# Altium PCB CANLINK_revA.PcbDoc (part 1 of 2)
Units mm, origin at the board's own origin, x right, y up, seen from the top; angles counter-clockwise.
Board outline 58.5 x 50 mm, 4 copper layers (Top Layer, Mid Layer 1, Mid Layer 2, Bottom Layer), stack 1.586 mm thick; 130 components, 134 nets, 434 pads, 142 vias.
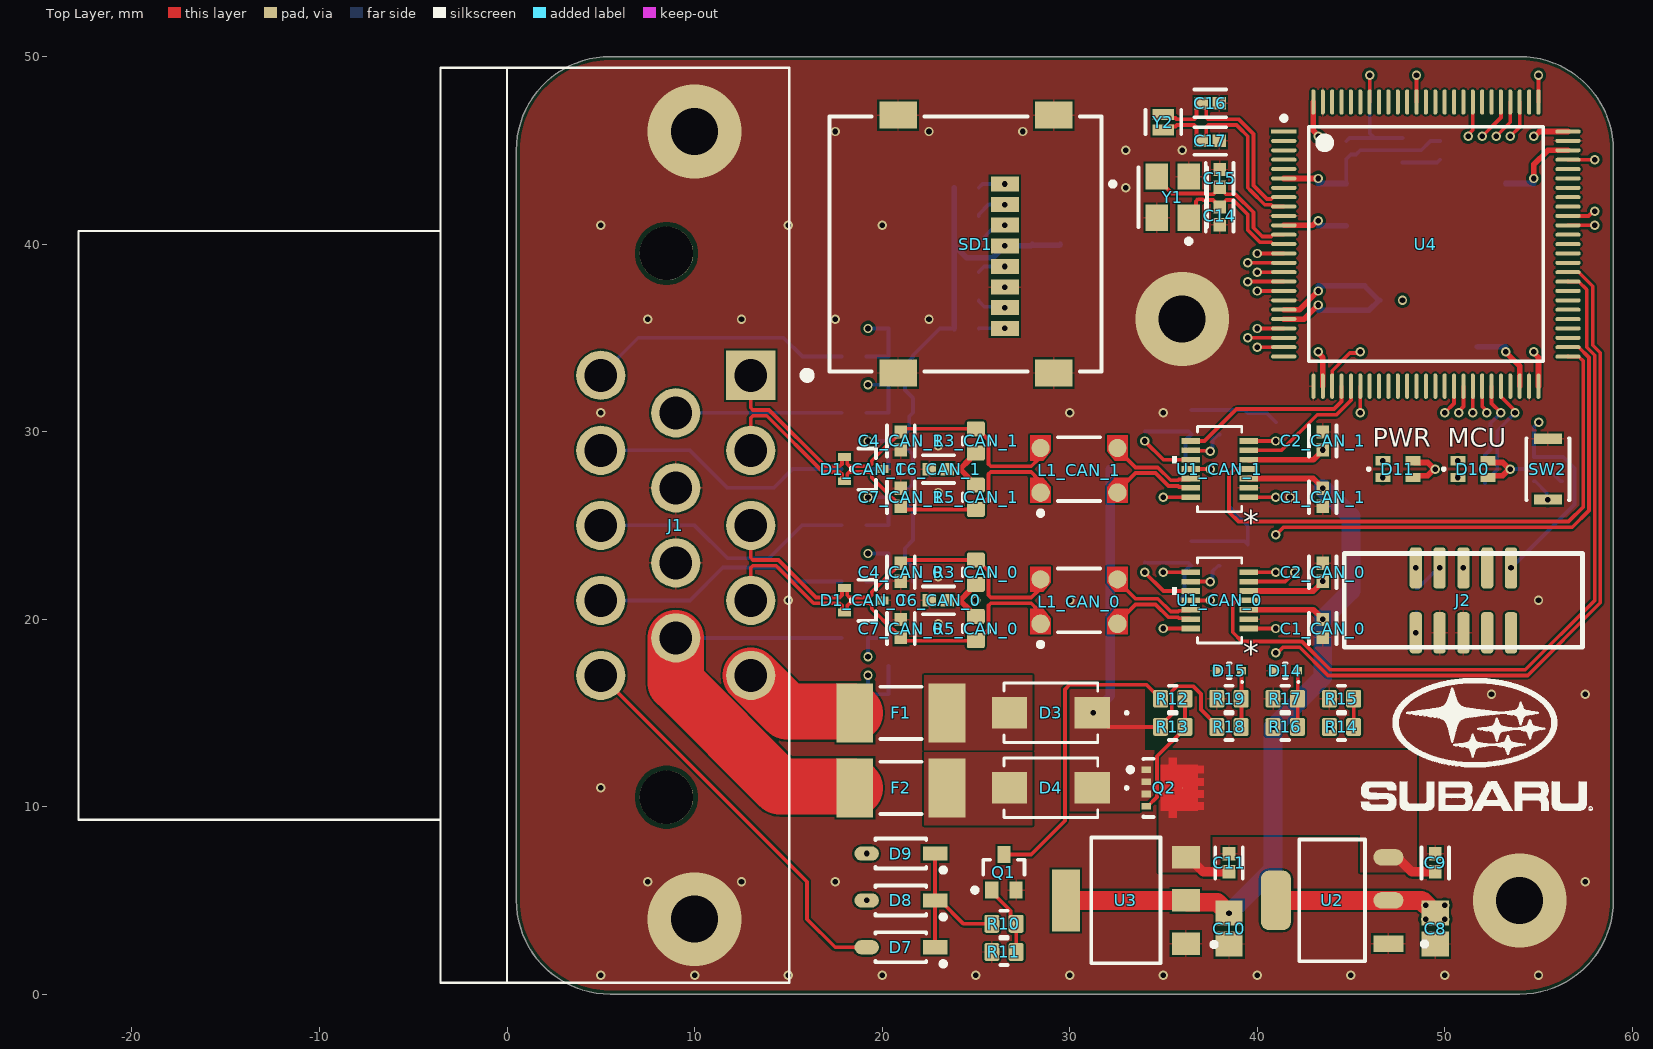
[diagram p0: Top Layer view]
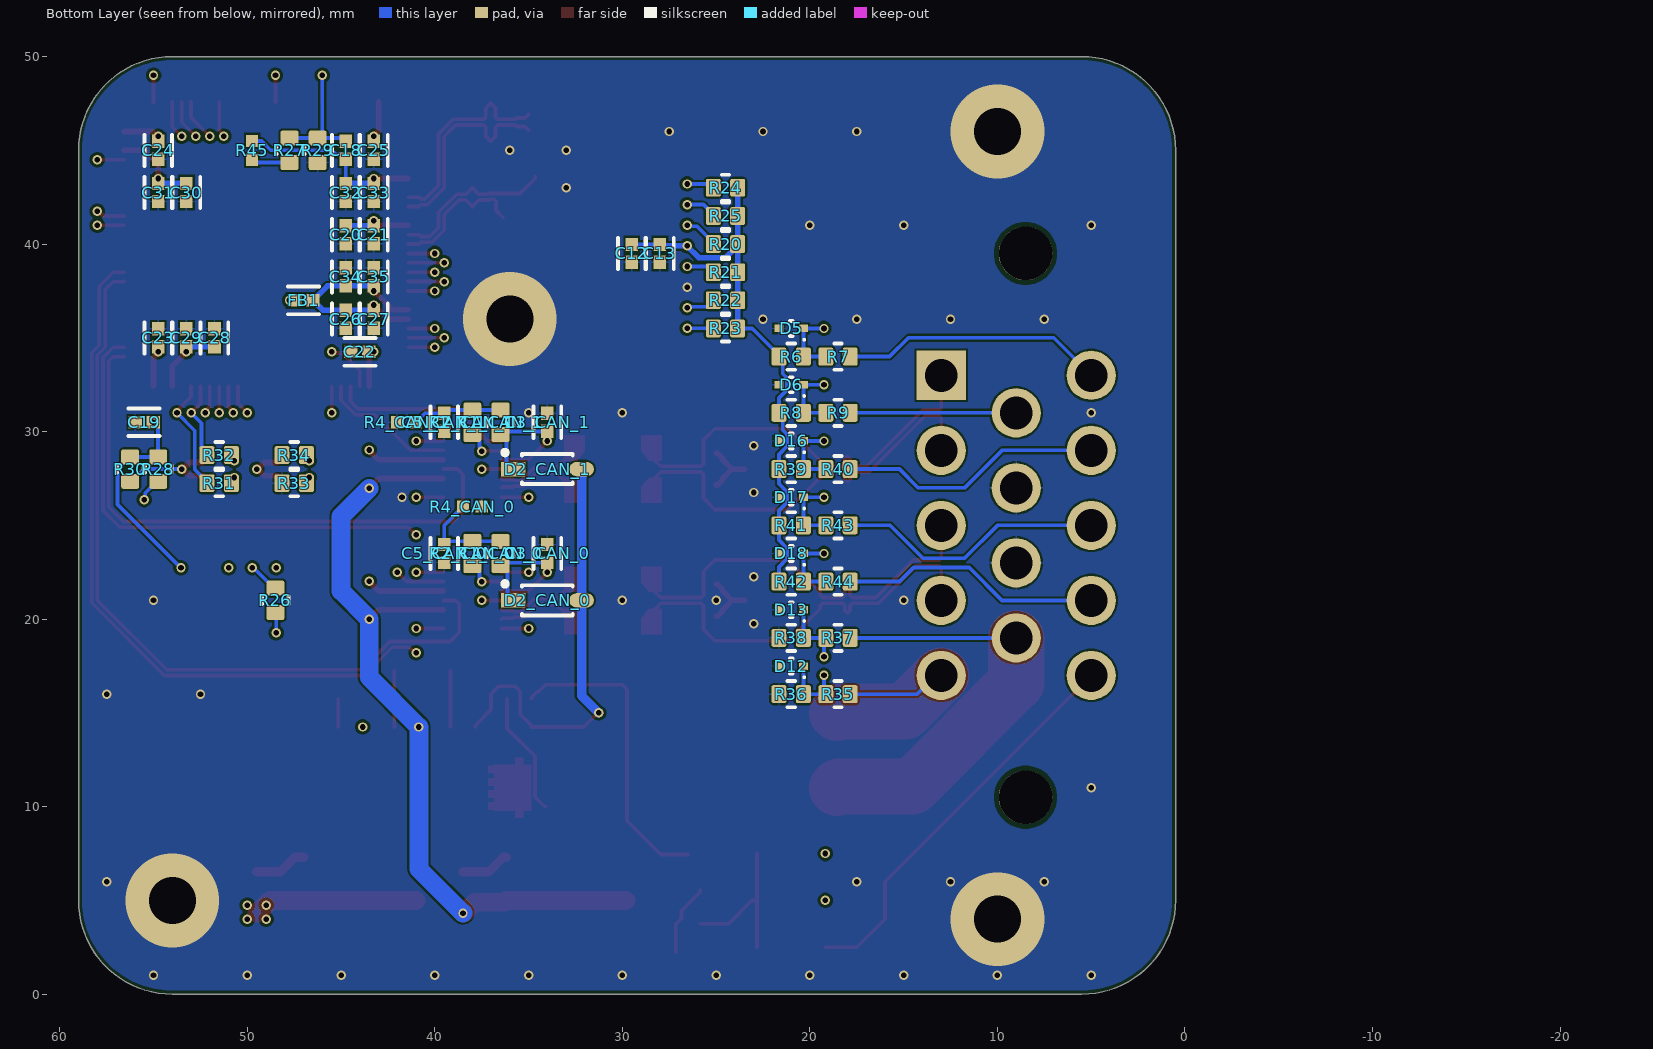
[diagram p1: Bottom Layer view, seen from below]
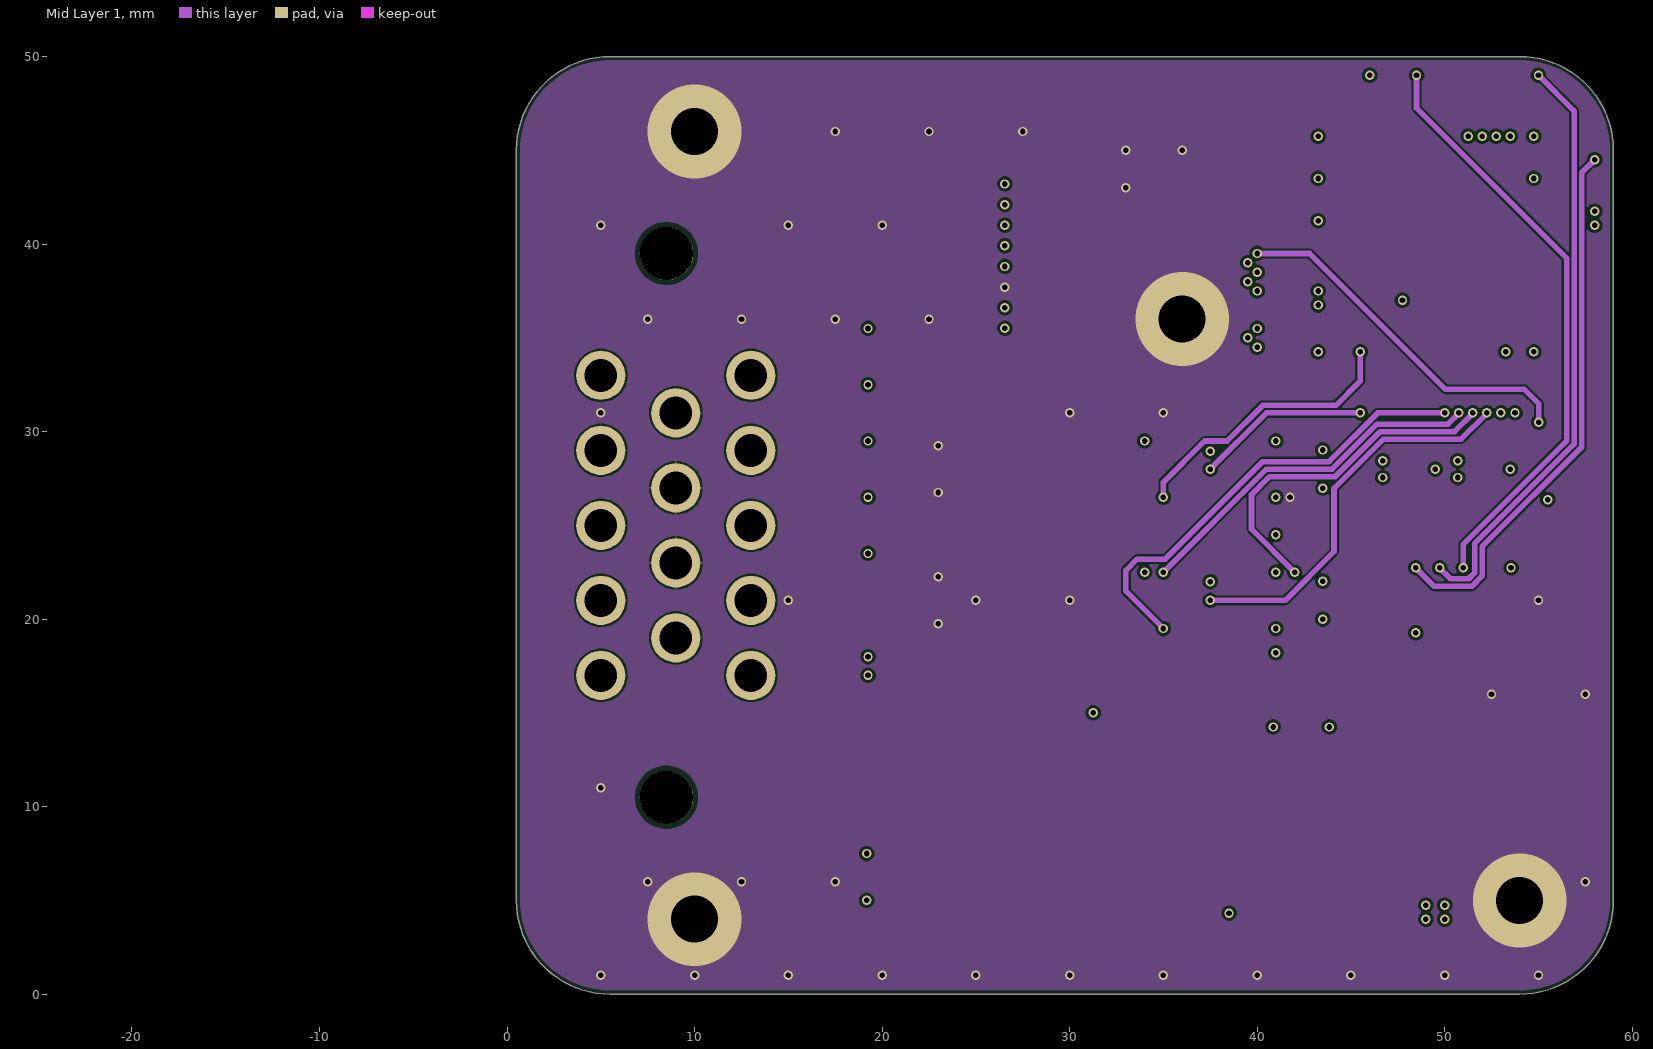
[diagram p2: Mid Layer 1]
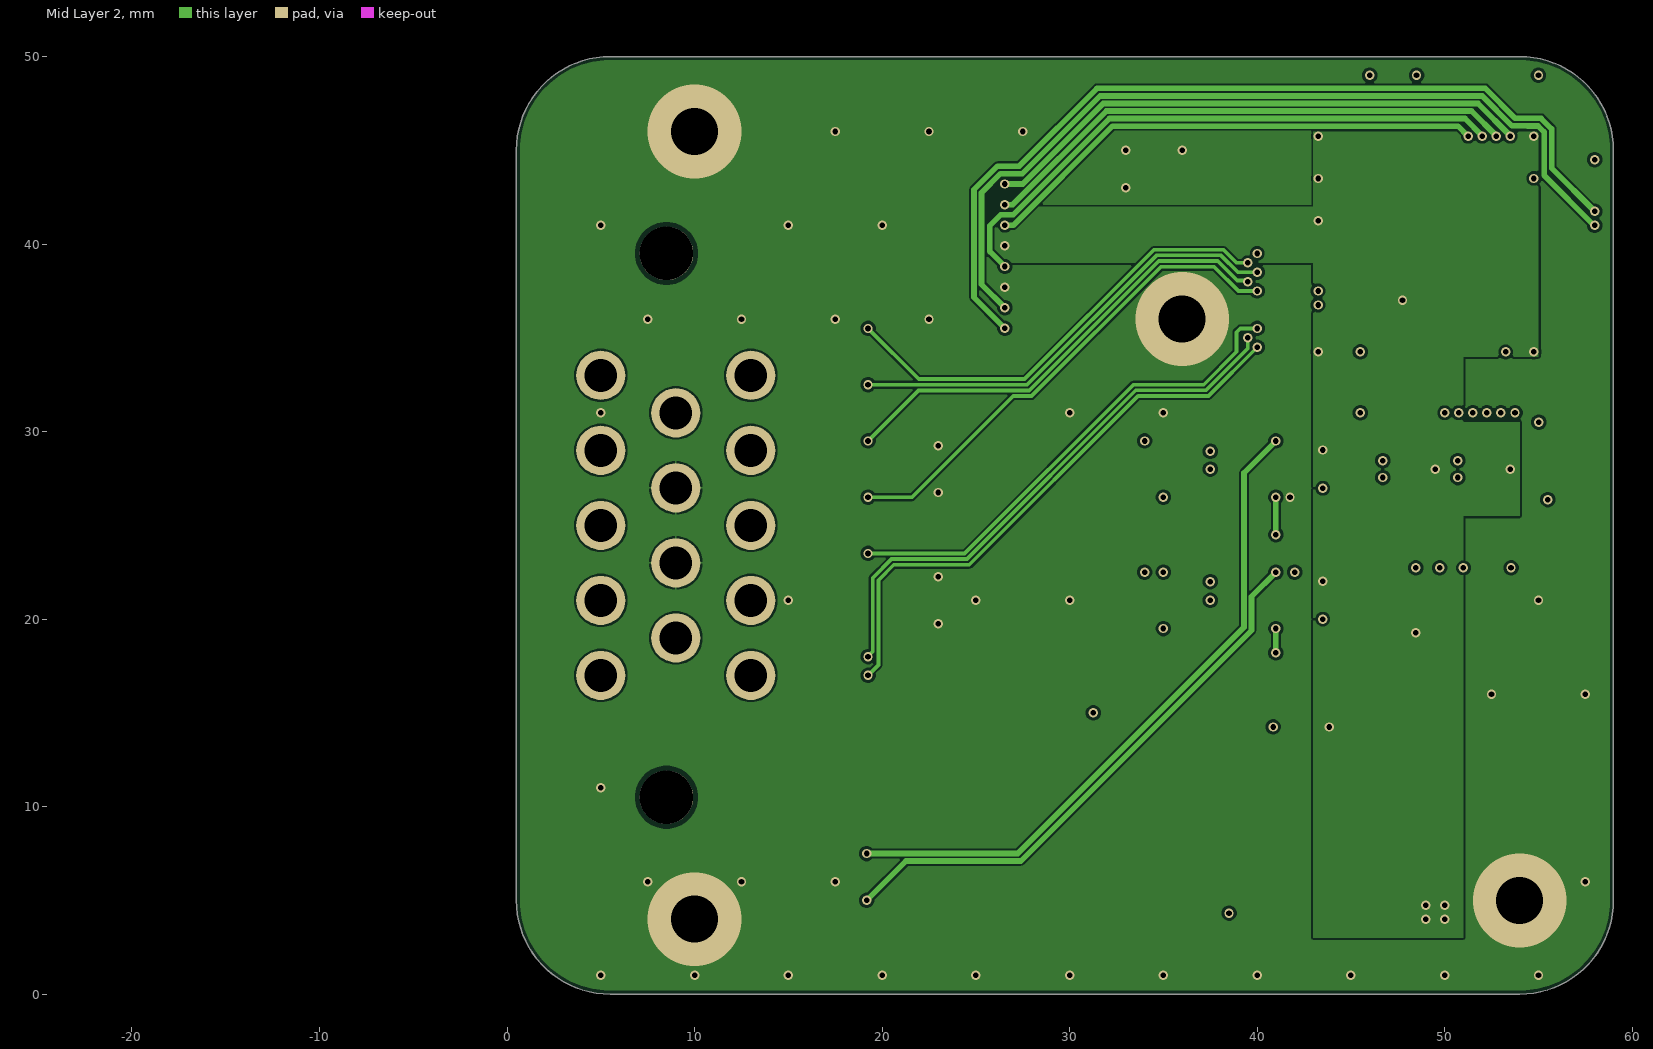
[diagram p3: Mid Layer 2]
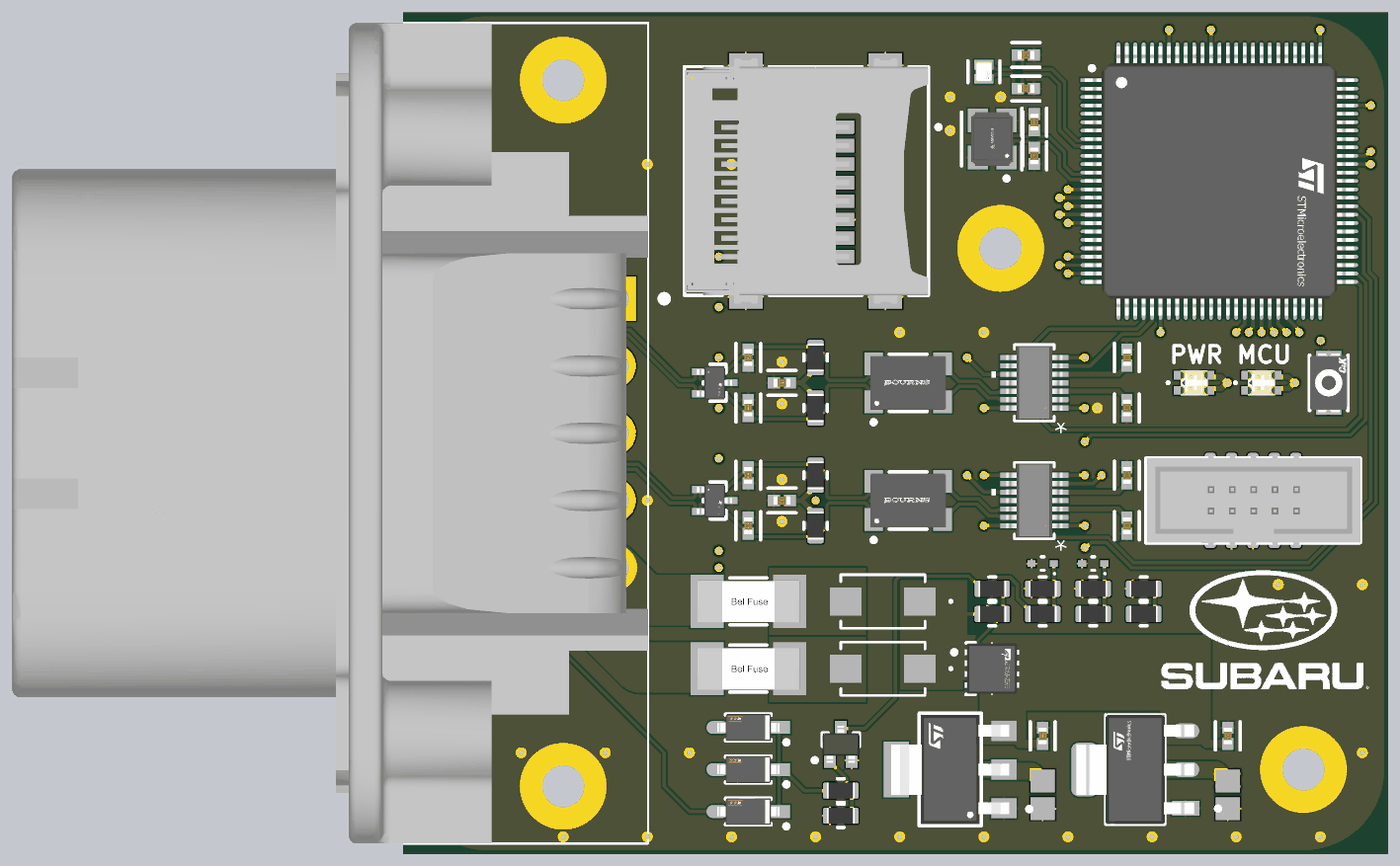
[diagram p5: 3D render of the assembled board from above, using the file's embedded part models]
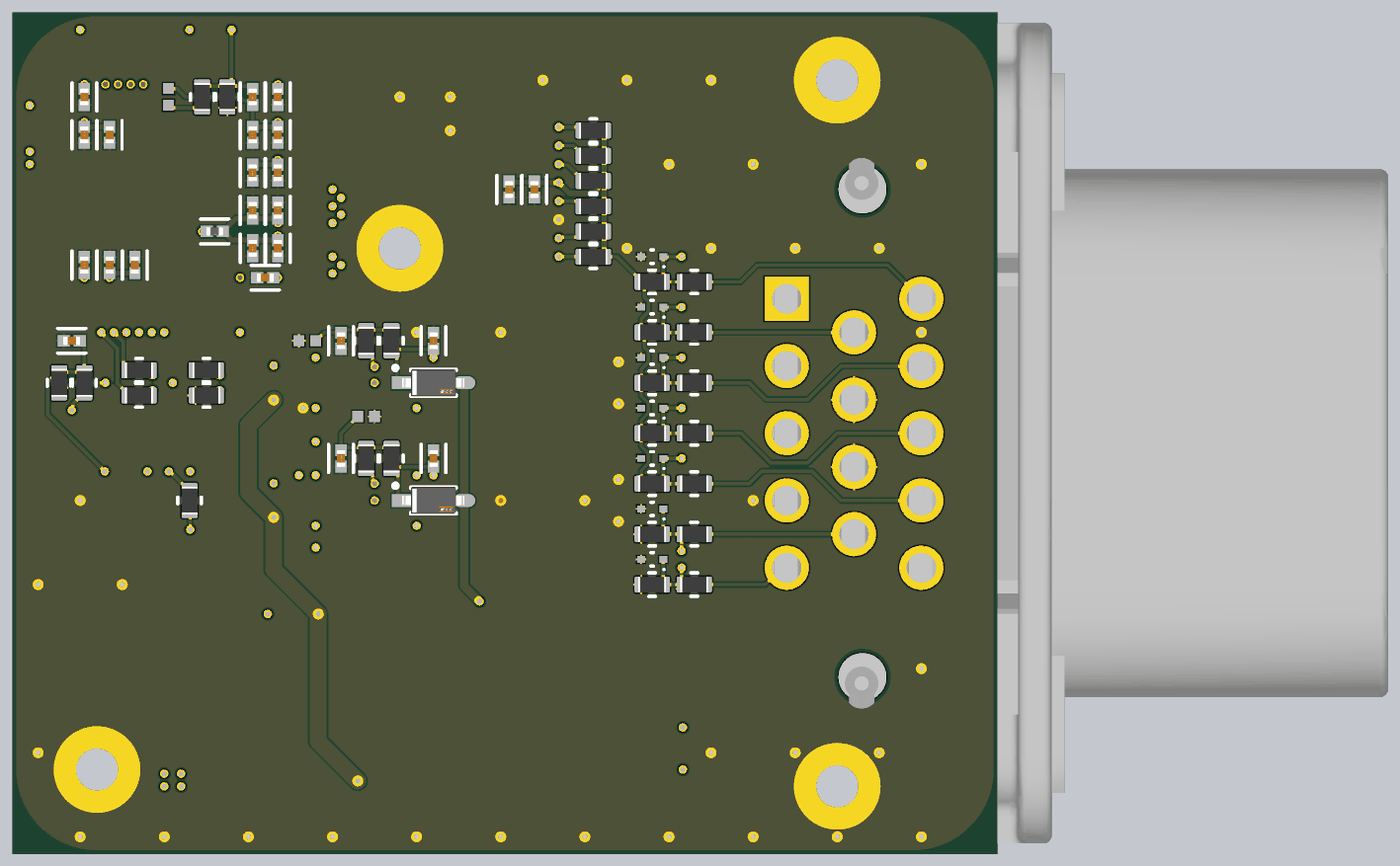
[diagram p6: 3D render of the assembled board from below, using the file's embedded part models]

## Layer stack, top to bottom
Top Solder: solder mask 0.0127, Solder Resist, Dk 3.8
Top Layer: signal copper 0.035
Dielectric 1: prepreg 0.2104, 7628, Dk 4.6
Mid Layer 1: signal copper 0.015
Core: core 1.065, FR-4, Dk 4.5
Mid Layer 2: signal copper 0.015
Dielectric 2: prepreg 0.2104, 7628, Dk 4.6
Bottom Layer: signal copper 0.035
Bottom Solder: solder mask 0.0127, Solder Resist, Dk 3.8

## Board outline
0.5,5 0.5,45 cw(c5.5,45) 5.5,50 54,50 cw(c54,45) 59,45 59,5 cw(c54,5) 54,0 5.5,0 cw(c5.5,5)

## Design rules (kind name [scope] priority, off if disabled: settings)
BoardOutlineClearance [All] p1: gap=0.2 ignorepadtopadclearanceinfootprint=FALSE
Clearance [All] p1: gap=0.102 ignorepadtopadclearanceinfootprint=FALSE except(0.127: Arc-Via Track-Via SMDPad-Via THPad-Via Via-Via Via-Fill Via-Poly Via-Region Via-Text; 0.25: Arc-Hole Track-Hole SMDPad-Hole THPad-Hole Via-Hole Fill-Hole Poly-Hole Region-Hole Text-Hole)
ComponentClearance [All] p1: gap=0.102 collisioncheckmode=3 verticalgap=0.102 showdistances=TRUE
DiffPairsRouting [All] p1: maxlimit=0.102 minlimit=0.102 mostfreqgap=0.102 toplayer_minwidth=0.102 toplayer_maxwidth=1816.048 toplayer_prefwidth=0.102 midlayer1_minwidth=0.102 midlayer1_maxwidth=1816.048 midlayer1_prefwidth=0.102 midlayer2_minwidth=0.102 midlayer2_maxwidth=1816.048 midlayer2_prefwidth=0.102 bottomlayer_minwidth=0.102 bottomlayer_maxwidth=1816.048 bottomlayer_prefwidth=0.102 maxuncoupledlength=12.7
Height [All] p1: minheight=0 maxheight=1816.048 prefheight=12.7
HoleSize [All] p1: absolutevalues=TRUE maxlimit=6.3 minlimit=0.2 maxpercent=80.000 minpercent=20.000
HoleToHoleClearance [All] p1: gap=0.25 allowstackedmicrovias=FALSE
MinimumAnnularRing [All] p1: minimumring=0.076
MinimumSolderMaskSliver [All] p1: minsoldermaskwidth=0
PlaneClearance [All] p1: clearance=0.102
PlaneConnect PlaneConnectPowerPads [InPadClass('PowerPads')] p1: planeconnectstyle=Direct reliefexpansion=0.508 reliefentries=4 reliefconductorwidth=0.254 reliefairgap=0.254
PlaneConnect [All] p2: pad.planeconnectstyle=Relief pad.reliefexpansion=0.3 pad.reliefentries=4 pad.reliefconductorwidth=0.102 pad.reliefairgap=0.102 via.planeconnectstyle=Direct via.reliefexpansion=0.3 via.reliefentries=4 via.reliefconductorwidth=0.127 via.reliefairgap=0.127
PolygonConnect PolygonConnectPowerPads [All vs InNetClass('PWR')] p1: connectstyle=Direct reliefconductorwidth=0.254 reliefentries=4 polygonreliefangle="90 Angle" airgapwidth=0.254
PolygonConnect [All] p2: thpad.connectstyle=Relief thpad.reliefconductorwidth=0.102 thpad.reliefentries=4 thpad.polygonreliefangle="90 Angle" thpad.airgapwidth=0.102 smdpad.connectstyle=Relief smdpad.reliefconductorwidth=0.102 smdpad.reliefentries=4 smdpad.polygonreliefangle="90 Angle" smdpad.airgapwidth=0.102 via.connectstyle=Direct via.reliefconductorwidth=0.127 via.reliefentries=4 via.polygonreliefangle="90 Angle" via.airgapwidth=0.127
RoomDefinition CAN_0 [InComponentClass('CAN_0')] p1: confinementstyle=ConfineIn formatcopy=TRUE lockcomponents=FALSE outline 45,27 17,27 17,18 45,18
RoomDefinition CAN_1 [InComponentClass('CAN_1')] p2: confinementstyle=ConfineIn formatcopy=TRUE lockcomponents=FALSE outline 45,34 17,34 17,25 45,25
RoutingVias [All] p1: holewidth=0.2 width=0.45 viastyle="Through Hole" minholewidth=0.2 minwidth=0.45 maxholewidth=6.3 maxwidth=6.55
SilkToSilkClearance [All] p1: silktosilkclearance=0
SilkToSolderMaskClearance [IsPad] p1: minsilkscreentomaskgap=0.102 clearancetoexposedcopper=TRUE
SolderMaskExpansion [All] p1: expansion=0.075 istentingtop=FALSE
SupplyNets "Schematic Supply Nets_3" [InNet('CAN_PWR')] p1: voltage=0.000
SupplyNets "Schematic Supply Nets_2" [InNet('3V3')] p2: voltage=0.000
SupplyNets "Schematic Supply Nets_1" [InNet('GND')] p3: voltage=0.000
SupplyNets "Schematic Supply Nets" [InNet('5V')] p4: voltage=0.000
Width [All] p1: maxlimit=1816.048 minlimit=0.102 preferedwidth=0.102
20 further rules are at their usual default settings.

## Classes and differential pairs
net class PWR: 3V3 5V CAN_PWR NetC9_1 NetD3_2 NetD4_2 PWR_A PWR_B
differential pair class CAN: CAN0 CAN1 PRE_CAN_CAN_0 PRE_CAN_CAN_1
channel class TCAN1146_PINOUT: CAN_0 CAN_1
component class SD_0: C12 C13 R20 R21 R22 R23 R24 R25 SD1
component class PWR_MGMT: C8 C9 C10 C11 D7 D8 D9 D14 D15 Q1 Q2 R10 R11 R12 R13 R14 R15 R16 R17 R18 R19 U2 U3
component class MCU_0: C14 C15 C16 C17 C18 C19 C20 C21 C22 C23 C24 C25 C26 C27 C28 C29 C30 C31 C32 C33 C34 C35 D10 D11 FB1 J2 R26 R27 R28 R29 R30 R31 R32 R33 R34 R45 SW2 U4 Y1 Y2
component class CANLink_revA: D3 D4 D5 D6 D12 D13 D16 D17 D18 F1 F2 J1 R6 R7 R8 R9 R35 R36 R37 R38 R39 R40 R41 R42 R43 R44
component class CAN_1: C1_CAN_1 C2_CAN_1 C3_CAN_1 C4_CAN_1 C5_CAN_1 C6_CAN_1 C7_CAN_1 D1_CAN_1 D2_CAN_1 L1_CAN_1 R1_CAN_1 R2_CAN_1 R3_CAN_1 R4_CAN_1 R5_CAN_1 U1_CAN_1
component class CAN_0: C1_CAN_0 C2_CAN_0 C3_CAN_0 C4_CAN_0 C5_CAN_0 C6_CAN_0 C7_CAN_0 D1_CAN_0 D2_CAN_0 L1_CAN_0 R1_CAN_0 R2_CAN_0 R3_CAN_0 R4_CAN_0 R5_CAN_0 U1_CAN_0
differential pair X: +X_P -X_N
differential pair X32: +X32_P -X32_N
differential pair PRE_CAN_CAN_1: +PRE_CAN_CAN_1_P -PRE_CAN_CAN_1_N
differential pair PRE_CAN_CAN_0: +PRE_CAN_CAN_0_P -PRE_CAN_CAN_0_N
differential pair CAN1: +CAN1_P -CAN1_N
differential pair CAN0: +CAN0_P -CAN0_N

## Components (designator, comment, footprint, x,y, rotation, side; value= is the part's Value field where it differs from the comment)
C1_CAN_0 "100n" FP-0402-L_1_0_0_05-W_0_5-IPC_A 43.5,19.5 r270 top (schematic designator C1)
C1_CAN_1 "100n" FP-0402-L_1_0_0_05-W_0_5-IPC_A 43.5,26.5 r270 top (schematic designator C1)
C2_CAN_0 "100n" FP-0402-L_1_0_0_05-W_0_5-IPC_A 43.5,22.5 r90 top (schematic designator C2)
C2_CAN_1 "100n" FP-0402-L_1_0_0_05-W_0_5-IPC_A 43.5,29.5 r90 top (schematic designator C2)
C3_CAN_0 "100n" FP-0402-L_1_0_0_05-W_0_5-IPC_A 34,23.5 r90 bottom (schematic designator C3)
C3_CAN_1 "100n" FP-0402-L_1_0_0_05-W_0_5-IPC_A 34,30.5 r90 bottom (schematic designator C3)
C4_CAN_0 "6.6p" FP-0402-L_1_0_0_05-W_0_5-IPC_A 21,22.5 r270 top (schematic designator C4)
C4_CAN_1 "6.6p" FP-0402-L_1_0_0_05-W_0_5-IPC_A 21,29.5 r270 top (schematic designator C4)
C5_CAN_0 "100n" FP-0402-L_1_0_0_05-W_0_5-IPC_A 39.5,23.5 r270 bottom (schematic designator C5)
C5_CAN_1 "100n" FP-0402-L_1_0_0_05-W_0_5-IPC_A 39.5,30.5 r270 bottom (schematic designator C5)
C6_CAN_0 "100n" FP-0402-L_1_0_0_05-W_0_5-IPC_A 23,21 r180 top (schematic designator C6)
C6_CAN_1 "100n" FP-0402-L_1_0_0_05-W_0_5-IPC_A 23,28 r180 top (schematic designator C6)
C7_CAN_0 "6.6p" FP-0402-L_1_0_0_05-W_0_5-IPC_A 21,19.5 r90 top (schematic designator C7)
C7_CAN_1 "6.6p" FP-0402-L_1_0_0_05-W_0_5-IPC_A 21,26.5 r90 top (schematic designator C7)
C8 "0805ZG106ZAT2A" CAPC2013X152X50NL20T25 49.5,3.5 r90 top
C9 "100n" FP-0402-L_1_0_0_05-W_0_5-IPC_A 49.5,7 r90 top
C10 "0805ZG106ZAT2A" CAPC2013X152X50NL20T25 38.5,3.5 r90 top
C11 "100n" FP-0402-L_1_0_0_05-W_0_5-IPC_A 38.5,7 r90 top
C12 "10u" FP-0402-L_1_0_0_05-W_0_5-IPC_A 29.5,39.5 r270 bottom
C13 "100n" FP-0402-L_1_0_0_05-W_0_5-IPC_A 28,39.5 r270 bottom
C14 "30p" FP-0402-L_1_0_0_05-W_0_5-IPC_A 38,41.5 r270 top
C15 "30p" FP-0402-L_1_0_0_05-W_0_5-IPC_A 38,43.5 r90 top
C16 "18p" FP-0402-L_1_0_0_05-W_0_5-IPC_A 37.5,47.5 r0 top
C17 "18p" FP-0402-L_1_0_0_05-W_0_5-IPC_A 37.5,45.5 r0 top
C18 "100n" FP-0402-L_1_0_0_05-W_0_5-IPC_A 44.75,45 r270 bottom
C19 "100n" FP-0402-L_1_0_0_05-W_0_5-IPC_A 55.5,30.5 r0 bottom
C20 "1u" FP-0402-L_1_0_0_05-W_0_5-IPC_A 44.75,40.5 r270 bottom
C21 "100n" FP-0402-L_1_0_0_05-W_0_5-IPC_A 43.25,40.5 r270 bottom
C22 "100n" FP-0402-L_1_0_0_05-W_0_5-IPC_A 44,34.25 r0 bottom
C23 "100n" FP-0402-L_1_0_0_05-W_0_5-IPC_A 54.75,35 r90 bottom
C24 "100n" FP-0402-L_1_0_0_05-W_0_5-IPC_A 54.75,45 r270 bottom
C25 "100n" FP-0402-L_1_0_0_05-W_0_5-IPC_A 43.25,45 r270 bottom
C26 "1u" FP-0402-L_1_0_0_05-W_0_5-IPC_A 44.75,36 r270 bottom
C27 "100n" FP-0402-L_1_0_0_05-W_0_5-IPC_A 43.25,36 r270 bottom
C28 "2.2u" FP-0402-L_1_0_0_05-W_0_5-IPC_A 51.75,35 r90 bottom
C29 "100n" FP-0402-L_1_0_0_05-W_0_5-IPC_A 53.25,35 r90 bottom
C30 "2.2u" FP-0402-L_1_0_0_05-W_0_5-IPC_A 53.25,42.75 r270 bottom
C31 "100n" FP-0402-L_1_0_0_05-W_0_5-IPC_A 54.75,42.75 r270 bottom
C32 "1u" FP-0402-L_1_0_0_05-W_0_5-IPC_A 44.75,42.75 r270 bottom
C33 "100n" FP-0402-L_1_0_0_05-W_0_5-IPC_A 43.25,42.75 r270 bottom
C34 "1u" FP-0402-L_1_0_0_05-W_0_5-IPC_A 44.75,38.25 r90 bottom
C35 "100n" FP-0402-L_1_0_0_05-W_0_5-IPC_A 43.25,38.25 r90 bottom
D1_CAN_0 "ESDCAN02-2BWY" FP-SOT323-3L-MFG 19,21 r0 top value=3pF (schematic designator D1)
D1_CAN_1 "ESDCAN02-2BWY" FP-SOT323-3L-MFG 19,28 r0 top value=3pF (schematic designator D1)
D2_CAN_0 "1N4148W-TP" FP-SOD-123-IPC_A 34,21 r180 bottom (schematic designator D2)
D2_CAN_1 "1N4148W-TP" FP-SOD-123-IPC_A 34,28 r180 bottom (schematic designator D2)
D3 "SK34A-LTP" SK34A-LTP-Footprint-1 29,15 r180 top
D4 "SK34A-LTP" SK34A-LTP-Footprint-1 29,11 r180 top
D5 "MM5Z3V3T1G" ONSC-SOD-523-2-502-01_V 21,35.5 r0 bottom
D6 "MM5Z3V3T1G" ONSC-SOD-523-2-502-01_V 21,32.5 r0 bottom
D7 "1N4148W-TP" FP-SOD-123-IPC_A 21,2.5 r180 top
D8 "1N4148W-TP" FP-SOD-123-IPC_A 21,5 r180 top
D9 "1N4148W-TP" FP-SOD-123-IPC_A 21,7.5 r180 top
D10 "150066RG54050" WL-SBCD_0606 51.5,28 r90 top
D11 "150066RG54050" WL-SBCD_0606 47.5,28 r90 top
D12 "MM5Z3V3T1G" ONSC-SOD-523-2-502-01_V 21,17.5 r0 bottom
D13 "MM5Z3V3T1G" ONSC-SOD-523-2-502-01_V 21,20.5 r0 bottom
D14 "MM5Z3V3T1G" ONSC-SOD-523-2-502-01_V 41.5,17.25 r180 top
D15 "MM5Z3V3T1G" ONSC-SOD-523-2-502-01_V 38.5,17.25 r180 top
D16 "MM5Z3V3T1G" ONSC-SOD-523-2-502-01_V 21,29.5 r0 bottom
D17 "MM5Z3V3T1G" ONSC-SOD-523-2-502-01_V 21,26.5 r0 bottom
D18 "MM5Z3V3T1G" ONSC-SOD-523-2-502-01_V 21,23.5 r0 bottom
F1 "0679L1000-05" FP-0679L-MFG 21,15 r0 top value=0.0038Ω
F2 "0679L1000-05" FP-0679L-MFG 21,11 r0 top value=0.0038Ω
FB1 "BLM15PX601SN1D" FP-BLM15-0_05-IPC_A 47,37 r180 bottom
J1 "776266-1" 776266-1-Footprint-1 9,25 r270 top
J2 "3220-10-0300-00" 3220-10-0300-00-Footprint-1 51,21 r90 top
L1_CAN_0 "SRF4532-510Y" FP-SRF4532-MFG 30.5,21 r0 top (schematic designator L1)
L1_CAN_1 "SRF4532-510Y" FP-SRF4532-MFG 30.5,28 r0 top (schematic designator L1)
Q1 "BSS138W-7-F" DIOD-SOT323-3_V 26.5,6.5 r90 top
Q2 "SISH615ADN-T1-GE3" SISH615ADN-T1-GE3-Footprint-1 35.49,11.038 r270 top
R1_CAN_0 "100k" R0603B 36.5,23.5 r90 bottom (schematic designator R1)
R1_CAN_1 "100k" R0603B 36.5,30.5 r90 bottom (schematic designator R1)
R2_CAN_0 "1k" R0603B 38,23.5 r90 bottom (schematic designator R2)
R2_CAN_1 "1k" R0603B 38,30.5 r90 bottom (schematic designator R2)
R3_CAN_0 "60.4" R0603B 25,22.5 r270 top (schematic designator R3)
R3_CAN_1 "60.4" R0603B 25,29.5 r270 top (schematic designator R3)
R4_CAN_0 "0402 JUMPER" RESC1005X40X25ML05T05 38,26 r0 bottom (schematic designator R4)
R4_CAN_1 "0402 JUMPER" RESC1005X40X25ML05T05 41.5,30.5 r180 bottom (schematic designator R4)
R5_CAN_0 "60.4" R0603B 25,19.5 r270 top (schematic designator R5)
R5_CAN_1 "60.4" R0603B 25,26.5 r270 top (schematic designator R5)
R6 "100k" R0603B 21,34 r180 bottom
R7 "1k" R0603B 18.5,34 r180 bottom
R8 "100k" R0603B 21,31 r180 bottom
R9 "1k" R0603B 18.5,31 r180 bottom
R10 "1k" R0603B 26.5,3.75 r180 top
R11 "100k" R0603B 26.5,2.25 r180 top
R12 "1k" R0603B 35.5,15.75 r180 top
R13 "100k" R0603B 35.5,14.25 r180 top
R14 "24k" R0603B 44.5,14.25 r0 top
R15 "100k" R0603B 44.5,15.75 r180 top
R16 "68k" R0603B 41.5,14.25 r0 top
R17 "100k" R0603B 41.5,15.75 r180 top
R18 "100k" R0603B 38.5,14.25 r0 top
R19 "10k" R0603B 38.5,15.75 r180 top
R20 "100k" R0603B 24.5,40 r0 bottom
R21 "100k" R0603B 24.5,38.5 r0 bottom
R22 "100k" R0603B 24.5,37 r0 bottom
R23 "100k" R0603B 24.5,35.5 r0 bottom
R24 "100k" R0603B 24.5,43 r0 bottom
R25 "100k" R0603B 24.5,41.5 r0 bottom
R26 "10k" R0603B 48.5,21 r270 bottom
R27 "330" R0603B 47.75,45 r270 bottom
R28 "330" R0603B 54.75,28 r270 bottom
R29 "100k" R0603B 46.25,45 r90 bottom
R30 "100k" R0603B 56.25,28 r90 bottom
R31 "330" R0603B 51.5,27.25 r180 bottom
R32 "330" R0603B 51.5,28.75 r180 bottom
R33 "330" R0603B 47.5,27.25 r180 bottom
R34 "330" R0603B 47.5,28.75 r180 bottom
R35 "100k" R0603B 18.5,16 r0 bottom
R36 "10k" R0603B 21,16 r0 bottom
R37 "100k" R0603B 18.5,19 r0 bottom
R38 "10k" R0603B 21,19 r0 bottom
R39 "100k" R0603B 21,28 r180 bottom
R40 "1k" R0603B 18.5,28 r180 bottom
R41 "100k" R0603B 21,25 r180 bottom
R42 "100k" R0603B 21,22 r180 bottom
R43 "1k" R0603B 18.5,25 r180 bottom
R44 "1k" R0603B 18.5,22 r180 bottom
R45 "0402 JUMPER" RESC1005X40X25ML05T05 49.75,45 r90 bottom
SD1 "47219-2001" MOLX-47219-2001-8_V 25,40 r270 top
SW2 "KXT331LHS" FP-KXT331LHS-MFG 55.5,28 r90 top
U1_CAN_0 "TCAN1146DYYRQ1" TCAN1146DYYRQ1-Footprint-1 38,21 r180 top (schematic designator U1)
U1_CAN_1 "TCAN1146DYYRQ1" TCAN1146DYYRQ1-Footprint-1 38,28 r180 top (schematic designator U1)
U2 "LDL1117S33R" FP-SOT223-0046067-IPC_C 44,5 r180 top
U3 "LDL1117S50R" FP-SOT-223-0046067_14-MFG 33,5 r180 top
U4 "STM32H730VBT6" FP-LQFP100-1L-IPC_C 49,40 r0 top
Y1 "ABM8G-25.000MHZ-18-D2Y-T" FP-ABM8G-MFG 35.5,42.5 r90 top
Y2 "ECS-.327-12.5-1210-TR" FP-ECX-1210-MFG 35,46.5 r270 top

## Footprints (in the part's own frame and the unit in brackets; to place one, negate y for a bottom-side part, rotate by r counter-clockwise, add the part's x,y. Pads: shape width x height; smd on the part's side, far side on the other; paste and mask are expansions set on the pad)
3220-10-0300-00-Footprint-1 [mm]
  rrect50% 2.2x0.65 smd: 1(-1.73,2.54) 2(1.73,2.54) 3(-1.73,1.27) 4(1.73,1.27) 5(-1.73,0) 6(1.73,0) 7(-1.73,-1.27) 8(1.73,-1.27) 9(-1.73,-2.54) 10(1.73,-2.54)
  silkscreen extent -2.5,-6.35 2.5,6.35, body extent -2.74,-6.39 2.76,6.31, height 5.22
776266-1-Footprint-1 [mm]
  rect 2.625x2.625 / inner round 2.625 / far side rect 2.625x2.625 hole 1.75: 1(-8,4)
  round 2.625 hole 1.75: 2(-4,4) 3(0,4) 4(4,4) 5(8,4) 6(-6,0) 7(-2,0) 8(2,0) 9(6,0) 10(-8,-4) 11(-4,-4) 12(0,-4) 13(4,-4) 14(8,-4)
  round 2.85 hole 2.85 unplated: ""(-14.5,-0.5) ""(14.5,-0.5)
  silkscreen extent -24.4,-31.85 24.4,7.2, body extent -24.4,-31.75 24.4,6.05, height 27.78
CAPC2013X152X50NL20T25 [mm] "Chip Capacitor, 2-Leads, Body 2.01x1.25mm, IPC Medium Density"
  rect 1.35x1.45 smd: 1(-0.825,0) 2(0.825,0)
  body extent -1.1,-0.72 1.11,0.72, height 1.52
DIOD-SOT323-3_V [mm] "SOT323, 3-Leads, Body 2.2x1.35mm, Pitch 0.65mm"
  rect 0.9x0.7 smd: 1(-0.95,0.65) 2(-0.95,-0.65) 3(0.95,0)
  silkscreen extent -1.07,-1.1 0.67,1.67, body extent -1.1,-1.1 1.1,1.1, height 1.07
FP-0402-L_1_0_0_05-W_0_5-IPC_A [mm]
  rect 0.715x0.672 smd paste+0 mask+0: 1(-0.479,0) 2(0.479,0)
  silkscreen extent -0.84,-0.74 0.84,0.74, body extent -1.04,-0.54 1.04,0.54, height 0.25
FP-0679L-MFG [mm]
  rect 1.96x3.15 smd paste+0 mask+0: 1(-2.455,0) 2(2.455,0)
  silkscreen extent -1.1,-1.4 1.1,1.4, body extent -3.53,-1.68 3.53,1.68, height 0.25
FP-ABM8G-MFG [mm]
  rect 1.4x1.2 smd paste+0 mask+0: 1(-1.1,-0.85) 2(1.1,-0.85) 3(1.1,0.85) 4(-1.1,0.85)
  silkscreen extent -2.47,-1.83 1.6,1.83, body extent -1.9,-1.55 1.9,1.55, height 0.25
FP-BLM15-0_05-IPC_A [mm]
  rect 0.715x0.672 smd paste+0 mask+0: 1(-0.479,0) 2(0.479,0)
  silkscreen extent -0.84,-0.74 0.84,0.74, body extent -0.5,-0.25 0.5,0.25, height 0.55
FP-ECX-1210-MFG [mm]
  rect 0.575x1.14 smd paste+0 mask+0: 1(-0.413,0) 2(0.413,0)
  silkscreen extent -0.65,-0.95 0.65,0.95, body extent -0.8,-0.67 0.8,0.67, height 0.25
FP-KXT331LHS-MFG [mm]
  rect 0.55x1.5 smd paste+0 mask+0: 1(-1.625,0) 2(1.625,0)
  silkscreen extent -1.65,-1.15 1.65,1.15, body extent -2,-1.25 2,1.25, height 0.25
FP-LQFP100-1L-IPC_C [mm]
  rect 1.355x0.212 smd paste+0 mask+0: 1(-7.575,6)
  rrect100% 1.355x0.212 smd paste+0 mask+0: 2(-7.575,5.5) 3(-7.575,5) 4(-7.575,4.5) 5(-7.575,4) 6(-7.575,3.5) 7(-7.575,3) 8(-7.575,2.5) 9(-7.575,2) 10(-7.575,1.5) 11(-7.575,1) 12(-7.575,0.5) 13(-7.575,0) 14(-7.575,-0.5) 15(-7.575,-1) 16(-7.575,-1.5) 17(-7.575,-2) 18(-7.575,-2.5) 19(-7.575,-3) 20(-7.575,-3.5) 21(-7.575,-4) 22(-7.575,-4.5) 23(-7.575,-5) 24(-7.575,-5.5) 25(-7.575,-6) 51(7.575,-6) 52(7.575,-5.5) 53(7.575,-5) 54(7.575,-4.5) 55(7.575,-4) 56(7.575,-3.5) 57(7.575,-3) 58(7.575,-2.5) 59(7.575,-2) 60(7.575,-1.5) 61(7.575,-1) 62(7.575,-0.5) 63(7.575,0) 64(7.575,0.5) 65(7.575,1) 66(7.575,1.5) 67(7.575,2) 68(7.575,2.5) 69(7.575,3) 70(7.575,3.5) 71(7.575,4) 72(7.575,4.5) 73(7.575,5) 74(7.575,5.5) 75(7.575,6)
  rrect100% 0.212x1.355 smd paste+0 mask+0: 26(-6,-7.575) 27(-5.5,-7.575) 28(-5,-7.575) 29(-4.5,-7.575) 30(-4,-7.575) 31(-3.5,-7.575) 32(-3,-7.575) 33(-2.5,-7.575) 34(-2,-7.575) 35(-1.5,-7.575) 36(-1,-7.575) 37(-0.5,-7.575) 38(0,-7.575) 39(0.5,-7.575) 40(1,-7.575) 41(1.5,-7.575) 42(2,-7.575) 43(2.5,-7.575) 44(3,-7.575) 45(3.5,-7.575) 46(4,-7.575) 47(4.5,-7.575) 48(5,-7.575) 49(5.5,-7.575) 50(6,-7.575) 76(6,7.575) 77(5.5,7.575) 78(5,7.575) 79(4.5,7.575) 80(4,7.575) 81(3.5,7.575) 82(3,7.575) 83(2.5,7.575) 84(2,7.575) 85(1.5,7.575) 86(1,7.575) 87(0.5,7.575) 88(0,7.575) 89(-0.5,7.575) 90(-1,7.575) 91(-1.5,7.575) 92(-2,7.575) 93(-2.5,7.575) 94(-3,7.575) 95(-3.5,7.575) 96(-4,7.575) 97(-4.5,7.575) 98(-5,7.575) 99(-5.5,7.575) 100(-6,7.575)
  silkscreen extent -7.7,-6.25 6.25,6.83, body extent -8.35,-8.35 8.35,8.35, height 0.25
FP-SOD-123-IPC_A [mm]
  rect 1.308x0.762 smd paste+0 mask+0: 1(-1.825,0)
  rrect100% 1.308x0.762 smd paste+0 mask+0: 2(1.825,0)
  silkscreen extent -2.39,-0.8 1.35,1.01, body extent -1.85,-0.8 1.85,0.8, height 1.35
FP-SOT223-0046067-IPC_C [mm]
  rect 1.604x0.88 smd paste+0 mask+0: 1(-3,2.3)
  rrect100% 1.604x0.88 smd paste+0 mask+0: 2(-3,0) 3(-3,-2.3)
  rrect55% 1.604x3.18 smd paste+0 mask+0: 4(3,0)
  silkscreen extent -5.05,-3.25 1.75,3.25, body extent -3.9,-3.35 3.9,3.35, height 0.25
FP-SOT323-3L-MFG [mm]
  rect 0.7x0.42 smd paste+0 mask+0: 1(-1,0.65) 2(-1,-0.65) 3(1,0)
  silkscreen extent -0.67,-1.1 0.67,1.1, body extent -1.45,-1.2 1.45,1.2, height 0.25
FP-SOT-223-0046067_14-MFG [mm]
  rect 1.5x1.2 smd paste+0 mask+0: 1(-3.2,2.3) 2(-3.2,0) 3(-3.2,-2.3)
  rect 1.5x3.3 smd paste+0 mask+0: 4(3.2,0)
  silkscreen extent -4.83,-3.35 1.85,3.35, body extent -4.05,-3.45 4.05,3.45, height 0.25
FP-SRF4532-MFG [mm]
  round 0.99 smd paste+0 mask+0: 1(-2.05,-1.25) 2(2.05,-1.25)
  round 0.97 smd paste+0 mask+0: 3(2.05,1.125) 4(-2.05,1.125)
  Top Layer region: -2.6,-1.8 -2.6,-0.45 -1.9,-0.45 -1.5,-0.95 -1.5,-1.8
  Top Layer region: -2.6,0.45 -2.6,1.8 -1.5,1.8 -1.5,0.95 -1.9,0.45
  Top Layer region: 1.5,-1.8 1.5,-0.95 1.9,-0.45 2.6,-0.45 2.6,-1.8
  Top Layer region: 1.5,1.8 2.6,1.8 2.6,0.45 1.9,0.45 1.5,0.95
  silkscreen extent -2.17,-2.47 1.12,1.7, body extent -2.7,-1.9 2.7,1.9, height 0.25
MOLX-47219-2001-8_V [mm] "CONN, 8-Leads, Body 14.5x13.6mm, Pitch 1.1mm"
  rect 0.8x1.5 smd: 1(-3.205,1.55) 2(-2.105,1.55) 3(-1.005,1.55) 4(0.095,1.55) 5(1.195,1.55) 6(2.295,1.55) 7(3.395,1.55) 8(4.495,1.55)
  rect 1.45x2 smd: 9(6.875,4.15) 10(6.875,-4.15) 11(-6.875,-4.15) 12(-6.875,4.15)
  silkscreen extent -6.8,-7.8 6.8,7.43, body extent -7.3,-7.79 7.3,6.71, height 1.91
ONSC-SOD-523-2-502-01_V [mm] "SOD, 2-Leads, Body 1.2x0.8mm"
  rect 0.48x0.4 smd: 1(-0.66,0) 2(0.66,0)
  silkscreen extent -0.75,-0.4 0.07,0.65, body extent -0.6,-0.4 0.6,0.4, height 0.7
R0603B [mm] "Chip Resistor, 0603, 2-Leads, Body 1.58x0.85mm, IPC Medium Density"
  rrect25% 0.8x0.95 smd: 1(-0.65,0) 2(0.65,0)
  silkscreen extent -0.2,-0.7 0.2,0.7, body extent -0.82,-0.48 0.82,0.48, height 0.5
RESC1005X40X25ML05T05 [mm] "Chip Resistor, 2-Leads, Body 1.00x0.50mm, IPC Low Density"
  rect 0.65x0.65 smd: 1(-0.5,0) 2(0.5,0)
  body extent -0.53,-0.27 0.53,0.28, height 0.4
SISH615ADN-T1-GE3-Footprint-1 [mm]
  rect 0.35x0.5 smd paste+0 mask+0: 1(-0.937,-1.4) 2(-0.288,-1.4) 3(0.363,-1.4) 4(1.012,-1.4)
  round 0.025 smd mask+0: 5-6-7-8(0.038,0.51)
  Top Layer region: -1.187,-0.63 -1.187,-0.215 -1.568,-0.215 -1.568,0.215 -1.187,0.215 -1.187,1.35 -1.137,1.35 -1.137,1.65 -0.737,1.65 -0.737,1.35 -0.487,1.35 -0.487,1.65 -0.088,1.65 -0.088,1.35 0.163,1.35 0.163,1.65 0.563,1.65 0.563,1.35 0.813,1.35 0.813,1.65 1.212,1.65 1.212,1.35 1.262,1.35 1.262,0.215 1.643,0.215 1.643,-0.215 1.262,-0.215 1.262,-0.63
  silkscreen extent -1.51,-2.37 1.59,-1.01, body extent -1.67,-1.75 1.74,1.75, height 0.25
SK34A-LTP-Footprint-1 [mil]
  rect 74x66 smd paste+0 mask+0: 1(-87,0) 2(87,0)
  silkscreen extent -162,-63 99,63
TCAN1146DYYRQ1-Footprint-1 [mil]
  rect 38.5x12 smd paste+0 mask+0: 1(-60.75,59.07) 2(-60.75,39.38) 3(-60.75,19.69) 4(-60.75,0) 5(-60.75,-19.69) 6(-60.75,-39.38) 7(-60.75,-59.07) 8(60.75,-59.07) 9(60.75,-39.38) 10(60.75,-19.69) 11(60.75,0) 12(60.75,19.69) 13(60.75,39.38) 14(60.75,59.07)
  silkscreen extent -47,-90 100,90, body extent -66,-84 66,84, height 43
WL-SBCD_0606 [mm] "SMT Bi-color Chip LED Diffuesed, body 1.5x1.6mm"
  rect 0.5x0.8 smd: 1(-0.45,0.8) 2(-0.45,-0.8) 3(0.45,-0.8) 4(0.45,0.8)
  silkscreen extent -0.07,1.47 0.07,1.62, body extent -0.75,-0.8 0.75,0.8, height 0.55

## Part data
C1_CAN_0 C1_CAN_1 C2_CAN_0 C2_CAN_1 C3_CAN_0 C3_CAN_1 C4_CAN_0 C4_CAN_1 C5_CAN_0 C5_CAN_1 C6_CAN_0 C6_CAN_1 C7_CAN_0 C7_CAN_1 C9 C11 C12 C13 C14 C15 C16 C17 C18 C19 C20 C21 C22 C23 C24 C25 C26 C27 C28 C29 C30 C31 C32 C33 C34 C35: library part CMP-001-00058-1, "LARGE PADS, 0402 CAP, CHANGE COMMENT TO MATCH REAL P/N", Capacitor Type=Ceramic, Case/Package=0402, Max Operating Temperature=85°C, Min Operating Temperature=-55°C, Mounting Technology="Surface Mount", Pins=2, RoHS Compliant=Yes
C8 C10: library part CMP-2007-04523-1, Manufacturer="AVX Interconnect / Elco", Part Number=0805ZG106ZAT2A
D1_CAN_0 D1_CAN_1: library part CMP-12225-000055-1, "TVS DIODE 26.5V 44V SOT323-3", Breakdown Voltage=28.5V, Capacitance=3pF, Clamping Voltage=44V, Manufacturer=STMicroelectronics, Max Junction Temp=+175°C, Package=SOT323-3L, Peak Pulse Current=3A, Peak Pulse Power=170W, Reverse Standoff Voltage=26.5V, Temperature="-55°C to +175°C", Temperature Range Low=-55°C, Automotive=Yes, Automotive Grade="Grade 0", Category=Diode, ComponentLink2Description=Datasheet, ComponentLink2URL=https://www.st.com/resource/en/datasheet/esdcan02-2bwy.pdf, Device Class L1="Circuit Protection", Device Class L2="TVS Diodes", Device Class L3=unset, Digikey Description="TVS DIODE 26.5V 44V SOT323-3", Direction=Bidirectional, Height=1.1mm, Ipc Land Pattern Name=SOT65P210X95-3, Lead Free=Yes, Manufacturer Part Number=ESDCAN02-2BWY, Mouser Description="TVS Diodes / ESD Suppressors Automotive dual-line Transil, Transient voltage suppressor (TVS) for CAN bus", Number Of Channels=2, Octopart=https://octopart.com/esdcan02-2bwy-stmicroelectronics-58631133, RoHS=TRUE, Standoff Height=0mm, Temperature Range High=+175°C
D2_CAN_0 D2_CAN_1 D7 D8 D9: library part CMP-2000-04993-2, "DIODE GEN PURP 100V 150MA SOD123", Average Rectified Current=150mA, Capacitance=4pF, Forward Voltage=1V, Max Forward Surge Current (Ifsm)=1A, Max Operating Temperature=150°C, Max Repetitive Reverse Voltage (Vrrm)=100V, Max Reverse Leakage Current=5uA, Max Surge Current=2A, Min Operating Temperature=-65°C, Package Quantity=3000, Power Dissipation=400mW, Current Rating=150mA, Element Configuration=Single, Forward Current=150mA, Height=1.2mm, Lead Free="Lead Free", Length=2.85mm, Max Reverse Voltage (DC)=100V, Mount="Surface Mount", Number of Pins=2, Output Current=150mA, Packaging="Tape and Reel", Peak Non-Repetitive Surge Current=2A, Polarity=Standard, Radiation Hardening=No, Recovery Time=4ns, Reverse Recovery Time=4ns, Voltage Rating (DC)=100V, Width=1.8mm
D3 D4: library part CMP-004-00058-2, "Rectifier Diode, Schottky, 1 Phase, 1 Element, 3A, 40V V(RRM), Silicon, DO-214AC", Forward Voltage=500mV, Max Operating Temperature=125°C, Pins=2, RoHS Compliant=Yes
D5 D6 D12 D13 D14 D15 D16 D17 D18: library part CMP-1060-00750-1, "Zener Voltage Regulator, 500 mW, 2-Pin SOD-523, Pb-Free, Tape and Reel", Manufacturer="On Semiconductor", ComponentLink1Description="Manufacturer URL", ComponentLink1URL=http://www.onsemi.com/, ComponentLink2Description=Datasheet, ComponentLink2URL=http://www.onsemi.cn/pub_link/Collateral/MM5Z2V4T1-D.PDF, ComponentLink3Description="Package Specification", ComponentLink3URL=http://www.onsemi.com/pub_link/Collateral/502-01.PDF, DatasheetVersion="Rev. 10", Mounting Technology="Surface Mount", P Max (W)=0.5, PackageDescription="2-Pin SOD, Body 1.2 x 0.8 mm", PackageReference=SOD-523-2-502-01, PackageVersion="Rev. E, 09/2010", Packing="Tape and Reel", PartNumber=MM5Z3V3T1G, RoHS=Pb-Free, VZ Typ (V)=3.3
D10 D11: library part CMP-004-00040-2, "Led, Red/Grn, 180Mcd/230Mcd, 624Nm/525Nm Rohs Compliant: Yes", Component Type=Standard, Design Item ID=CMP-004-00034-2, Pins=4, Source=rgled.SchLib
F1 F2: library part CMP-16042-000002-1, "DIFF P#!!! /  / FUSE BRD MNT 1A 125VAC/VDC", Fuse Current=15A, Fuse Interrupt Ac Current=50A, Fuse Interrupt Dc Current=300A, Fuse Voltage Drop=0.13V, Manufacturer="Bel Fuse", Manufacturer Part Number=0679L9150-01, Max Fuse Ac Voltage=125V, Package=0679L, Resistance=0.0038Ω, Temperature="-55°C to +125°C", Temperature Range High=+125°C, Temperature Range Low=-55°C, Automotive=Yes, Automotive Grade="Grade 1", Category=Fuse, ComponentLink2Description=Datasheet, ComponentLink2URL=https://www.belfuse.com/resources/CircuitProtection/datasheets/0679L%20Sep2016.pdf, Device Class L1="Circuit Protection", Device Class L2=Fuses, Device Class L3=unset, Digikey Description="FUSE BRD MNT 15A 125VAC/VDC", Fuse Blow Speed=Fast, Fuse I2T=103.5A2Sec, Height=2.79mm, Ipc Land Pattern Name=CAPC610254X254, Lead Free=Yes, Max Fuse Dc Voltage=125V, Octopart=https://octopart.com/0679l9150-01-bel+fuse-70850665, RoHS=TRUE, Voltage Rating=125V
FB1: library part CMP-0686-00252-4, "Chip Ferrite Bead, 0402, 600Ω @ 100MHz, 0.23Ω, 25%, 900mA", Case Code (Imperial)=0402, Case Code (Metric)=1005, Current Rating=900mA, DC Resistance (DCR)=230mR, Max Operating Temperature=125°C, Min Operating Temperature=-55°C, Package Quantity=10000, Test Frequency=100MHz, Tolerance=25%, Case/Package=0402, Height=0.5mm, Impedance=600R, Lead Free="Lead Free", Length=1mm, Material=Steel, Max Current Rating=900mA, Max DC Current=900mA, Number of Circuits=1, Number of Lines=1, Number of Pins=2, Packaging="Tape and Reel", Termination=SMD/SMT, Width=0.5mm
J1: library part CMP-002-00087-1, "Board Connector", Connector Type="BOARD CONNECTOR", RoHS Compliant=Yes
J2: library part CMP-001-0013-3, "CONN HEADER SMD 10POS 1.27MM"
L1_CAN_0 L1_CAN_1: library part CMP-07251-000006-1, "CMC 51UH 200MA 2LN 2KOHM SMD", Case/Package=4532, Current=200mA, DC Resistance (DCR)=3.5R, Inductance=51uH, Insulation Resistance=10MR, Max Operating Temperature=125°C, Min Operating Temperature=-40°C, Package Quantity=1, Resistance=2kR, Self Resonant Frequency=100kHz, Tolerance=50%, Voltage Rating (DC)=50V, Contact Plating=Tin, Core Material=Ferrite, Current Rating=200mA, DC Current=200mA, Depth=3.4mm, Element Configuration=Dual, Height=0.118inch, Impedance=2kR, Lead Free="Lead Free", Length=4.5mm, Material=Steel, Max DC Current=200mA, Mount="Surface Mount", Number of Lines=2, Packaging="Tape and Reel", REACH SVHC="No SVHC", RoHS Compliant=Yes, Series=SRF4532, Termination=SMD/SMT, Test Frequency=100kHz, Width=0.126inch
Q1: library part CMP-2000-05968-1, "N-Channel Enhancement Mode Mosfet, 50 V, 200 mA, -55 to 150 degC, 6-Pin SOT-323, RoHS, Tape and Reel", Id - Continuous Drain Current=200mA, Manufacturer=DiodesIncorporated, Maximum Operating Temperature=+150C, Minimum Operating Temperature=-55C, Package / Case=SOT-323-3, Package Description="3-Pin Small Outline Transistor, Body 2 x 1.25 mm, Pitch 0.65 mm", Package Reference=SOT323, Pd - Power Dissipation=200mW, Rds On - Drain-Source Resistance=1.4Ohms, Vds - Drain-Source Breakdown Voltage=75V, Vgs - Gate-Source Voltage=20V, Brand=DiodesIncorporated, Channel Mode=Enhancement, Configuration=Single, Datasheet URL=http://www.diodes.com/_files/datasheets/ds30206.pdf, Datasheet Version="Rev. 11-2, 09/2013", Factory Pack Quantity=3000, Forward Transconductance - Min=0.1S, Height=1mm, Length=2.2mm, Manufacturer URL=http://www.diodes.com/, Mounting Style=SMD/SMT, Mounting Technology=SurfaceMount, Number Of Channels=1Channel, Packaging=Reel, Product=MOSFETSmallSignal, Product Category=MOSFET, RoHS=True, Series=BSS138, Technology=Si, Transistor Polarity=N-Channel, Transistor Type=1N-Channel, Type=EnhancementModeFieldEffectTransistor, Typical Turn-Off Delay Time=20ns, Typical Turn-On Delay Time=20ns, Unit Weight=0.000212oz, Width=1.35mm
Q2: library part CMP-013-00018-2, "Trans MOSFET P-CH 20V 22.1A 8-Pin PowerPAK 1212 EP T/R", Component Type=Standard, Design Item ID=CMP-013-00036-4, Pins=5, Source=SISH615ADN-T1-GE3.SchLib
R1_CAN_0 R1_CAN_1 R2_CAN_0 R2_CAN_1 R3_CAN_0 R3_CAN_1 R5_CAN_0 R5_CAN_1 R6 R7 R8 R9 R10 R11 R12 R13 R14 R15 R16 R17 R18 R19 R20 R21 R22 R23 R24 R25 R26 R27 R28 R29 R30 R31 R32 R33 R34 R35 R36 R37 R38 R39 R40 R41 R42 R43 R44: library part CMP-009-00002-14, "Resistor"
R4_CAN_0 R4_CAN_1 R45: library part CMP-009-00118-2, "READ THE NAME", Component Type=Standard, Design Item ID=CMP-009-00206-2, Pins=2, Source=0402jump.SchLib
SD1: library part CMP-2000-05245-1, "MicroSD Card Connector, Hinge Type, -40 to 85 degC, 8-Pin SMD, RoHS, Tape and Reel", Current Rating=500mA, Manufacturer=Molex, Voltage Rating=100VDC, Brand=Molex, Card Type=microSD, Contact Material=CopperAlloy, Datasheet URL=http://www.molex.com/pdm_docs/sd/472192001_sd.pdf, Datasheet Version="Rev. F, 06/2009", Factory Pack Quantity=2400, Housing Material=Thermoplastic, Insertion - Extraction Style=Hinged, Manufacturer URL=http://www.molex.com/, Mounting Style=SMD/SMT, Number of Contacts=8, Packaging=Reel, Pitch=1.09mm, Product=CardConnectors, Product Category=MemoryCardConnectors, RoHS=Details, Series=47219, Termination Style=SMD
SW2: library part CMP-10040-000029-1, "SWITCH TACTILE SPST-NO 0.02A 15V", Current Rating=5A, Flammability Rating="UL94 V-0", Insulation Color=Black, Max Operating Temperature=85°C, Min Operating Temperature=-40°C, Operating Force=240gf, Actuator Type=Standard, Connector Type=USB, Contact Plating=Gold, Gender=Receptacle, Illumination Type=Non-Illuminated, Mechanical Life=500000Cycles, Mount="Surface Mount", Number of Contacts=24, Number of Ports=1, Packaging="Tape and Reel", Switch Function=Off-Mom, Switch Travel=0.13mm, Termination=Solder, Throw Configuration=SPST
U1_CAN_0 U1_CAN_1: library part CMP-318-000000-2, "Automotive CAN FD transceiver with watchdog, bus diagnostics and partial networking via sele 14-SOT-23-THIN -40 to 150", Component Type=Standard, Design Item ID=CMP-015-00012-2, Pin Count=14, Source=TCAN1146DYYRQ1.SchLib
U2: library part CMP-12153-000006-1, "IC REG LINEAR 3.3V 1.2A SOT223", Dropout Voltage=350mV, Manufacturer=STMicroelectronics, Max Junction Temp=+125°C, Max Supply Voltage=18V, Min Supply Voltage=2.6V, Nominal Supply Current=250uA, Output Current=2A, Output Voltage=3.3V, Package=SOT223-0046067, Temperature="-40°C to +125°C", Temperature Range Low=-40°C, Accuracy Percentage=2%, Automotive=No, Category=IC, ComponentLink2Description=Datasheet, ComponentLink2URL=https://www.st.com/resource/en/datasheet/ldl1117.pdf, Device Class L1="Integrated Circuits (ICs)", Device Class L2="Power Management ICs", Device Class L3="Voltage Regulators - Linear", Digikey Description="IC REG LINEAR 3.3V 1.2A SOT223", Height=1.9mm, Ipc Land Pattern Name=SOT230P700X190-4, Lead Free=Yes, Manufacturer Part Number=LDL1117S33R, Mouser Description="LDL1117 Series 1.2 A 3.3 V High PSRR LDO Linear Voltage Regulator-SOT-223", Number of Outputs=1, Octopart=https://octopart.com/ldl1117s33r-stmicroelectronics-81876163, Output Type=Fixed, RoHS=TRUE, Standoff Height=0.02mm, Temperature Range High=+125°C
U3: library part CMP-12153-000005-1, "IC REG LINEAR 5V 1.2A SOT223", Dropout Voltage=350mV, Manufacturer=STMicroelectronics, Max Junction Temp=+150°C, Max Supply Voltage=18V, Min Supply Voltage=2.6V, Nominal Supply Current=250uA, Output Current=2A, Output Voltage=5V, Package=SOT-223-0046067_14, Temperature="-40°C to +125°C", Temperature Range High=+125°C, Temperature Range Low=-40°C, Accuracy Percentage=2%, Automotive=No, Category=IC, ComponentLink2Description=Datasheet, ComponentLink2URL=https://www.st.com/content/ccc/resource/technical/document/datasheet/group3/0e/5a/00/ca/10/1a/4f/a5/DM00366442/files/DM00366442.pdf/jcr:content/translations/en.DM00366442.pdf, Device Class L1="Integrated Circuits (ICs)", Device Class L2="Power Management ICs", Device Class L3="Voltage Regulators - Linear", Digikey Description="IC REG LINEAR 5V 1.2A SOT223", Height=1.9mm, Lead Free=Yes, Manufacturer Part Number=LDL1117S50R, Mouser Description="LDL1117 Series 1.2 A 5 V High PSRR LDO Linear Voltage Regulator - SOT-223", Number of Outputs=1, Octopart=https://octopart.com/ldl1117s50r-stmicroelectronics-81876164, Output Type=Fixed, RoHS=TRUE, Standoff Height=0.02mm
U4: library part CMP-12105-000107-1, "IC MCU 32BIT 128KB FLASH 100LQFP"
Y1: library part CMP-2000-05733-3, "Crystal 25MHz ±20ppm (Tol) ±30ppm (Stability) 18pF FUND 60Ω 4-Pin SMD T/R", Case/Package=CSMD, ESR (Equivalent Series Resistance)=60R, Frequency=25MHz, Frequency Stability=30ppm, Frequency Tolerance=20ppm, Load Capacitance=18pF, Max Operating Temperature=85°C, Min Operating Temperature=-40°C, Operating Frequency="25 MHz", Package Quantity=1000, Depth=2.5mm, Height=0.039inch, Lead Free="Lead Free", Length=3.2mm, Mount="Surface Mount", Number of Pins=4, Packaging="Tape and Reel", Radiation Hardening=No, Series=ABM8G, Series Resistance=60R, Termination=SMD/SMT, Tolerance=20ppm, Width=0.098inch
Y2: library part CMP-40224-000006-1, "CRYSTAL 32.7680KHZ 12.5PF SMD", Frequency=32.768kHz, Load Capacitance=12.5pF, Manufacturer="ECS International", Package=ECX-1210, Temperature="-40°C to +85°C", Temperature Range High=+85°C, Temperature Range Low=-40°C, Tolerance=20ppm, Automotive=No, Category=Crys, ComponentLink2Description=Datasheet, ComponentLink2URL=https://ecsxtal.com/store/pdf/ECX-1210.pdf, Device Class L1="Passive Components", Device Class L2="Crystals / Oscillators", Device Class L3=Crystals, Digikey Description="CRYSTAL 32.7680KHZ 12.5PF SMD", Esr=90kΩ, Height=0.5mm, Lead Free=Yes, Manufacturer Part Number=ECS-.327-12.5-1210-TR, Octopart=https://octopart.com/ecs-.327-12.5-1210-tr-ecs+international-81221340, RoHS=TRUE, Series=ECX-1210

## Via types
v1: diameter 0.5, hole 0.3, Top Layer to Bottom Layer, 138 vias
v2: diameter 5, hole 2.5, Top Layer to Bottom Layer, 4 vias